# Altium PCB Adapt.PcbDoc
Units mm, origin at the board's own origin, x right, y up, seen from the top; angles counter-clockwise.
Board outline 50 x 72 mm, 2 copper layers (Top Layer, Bottom Layer); 78 components, 54 nets, 333 pads, 335 vias.
Unrouted connection lines stored in the file: 2.
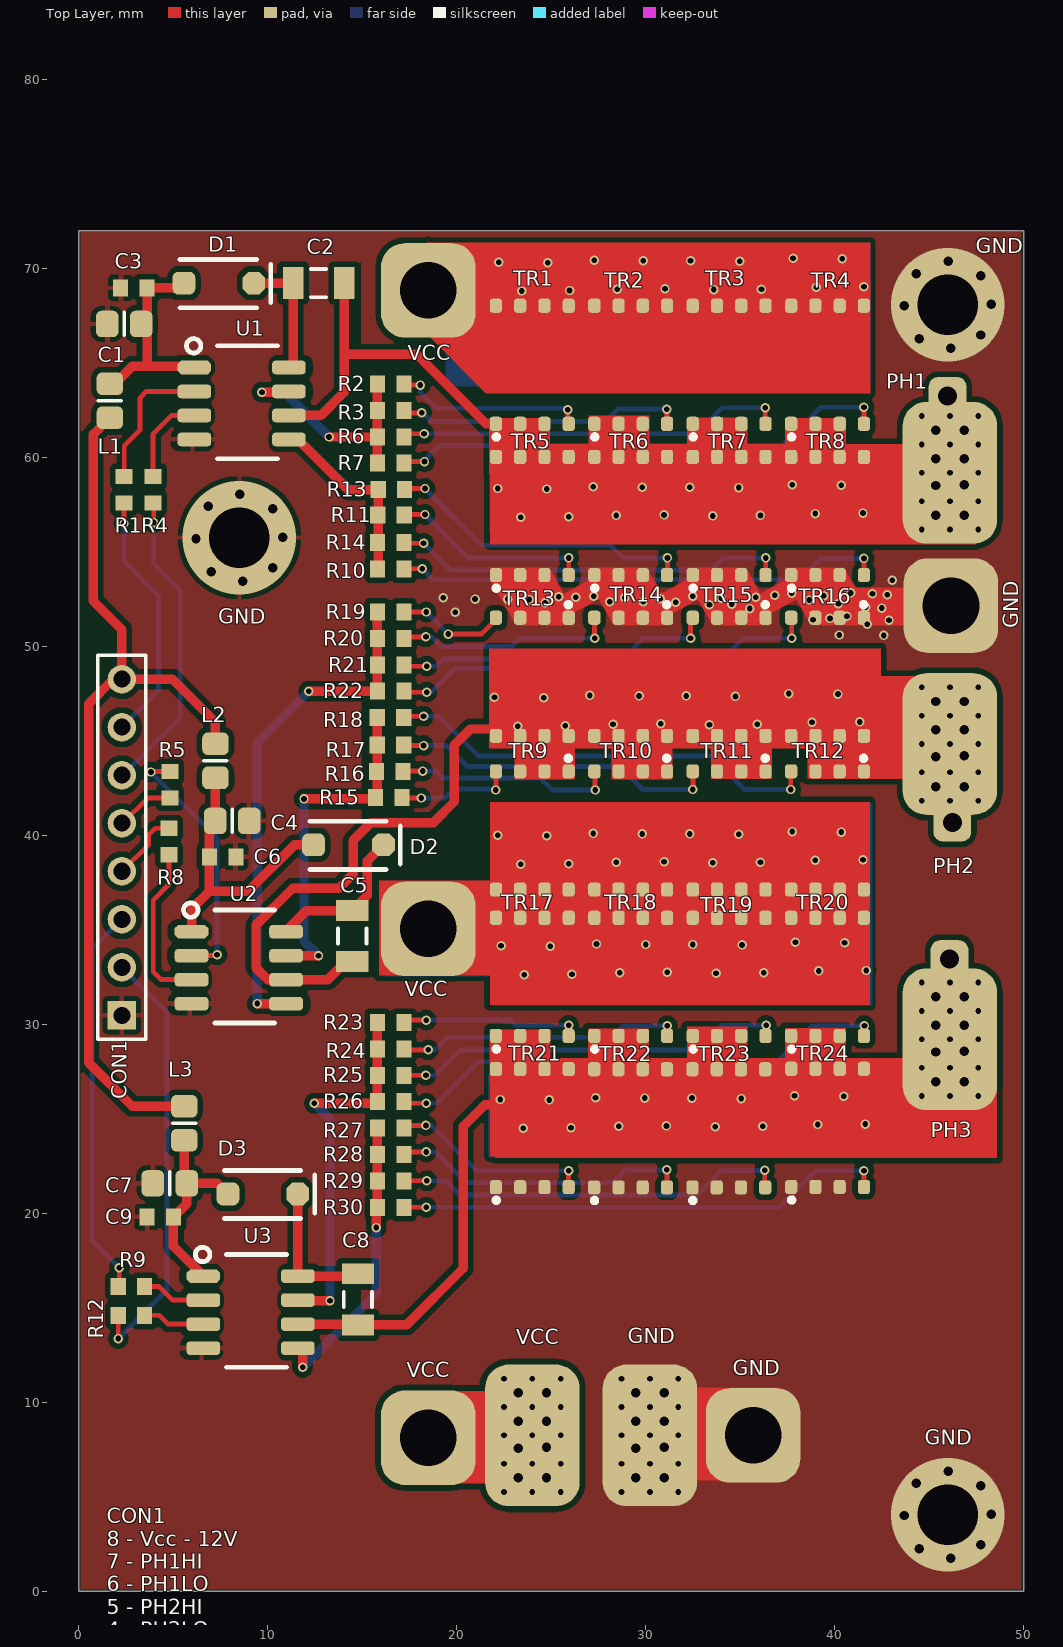
[diagram p0: Top Layer view]
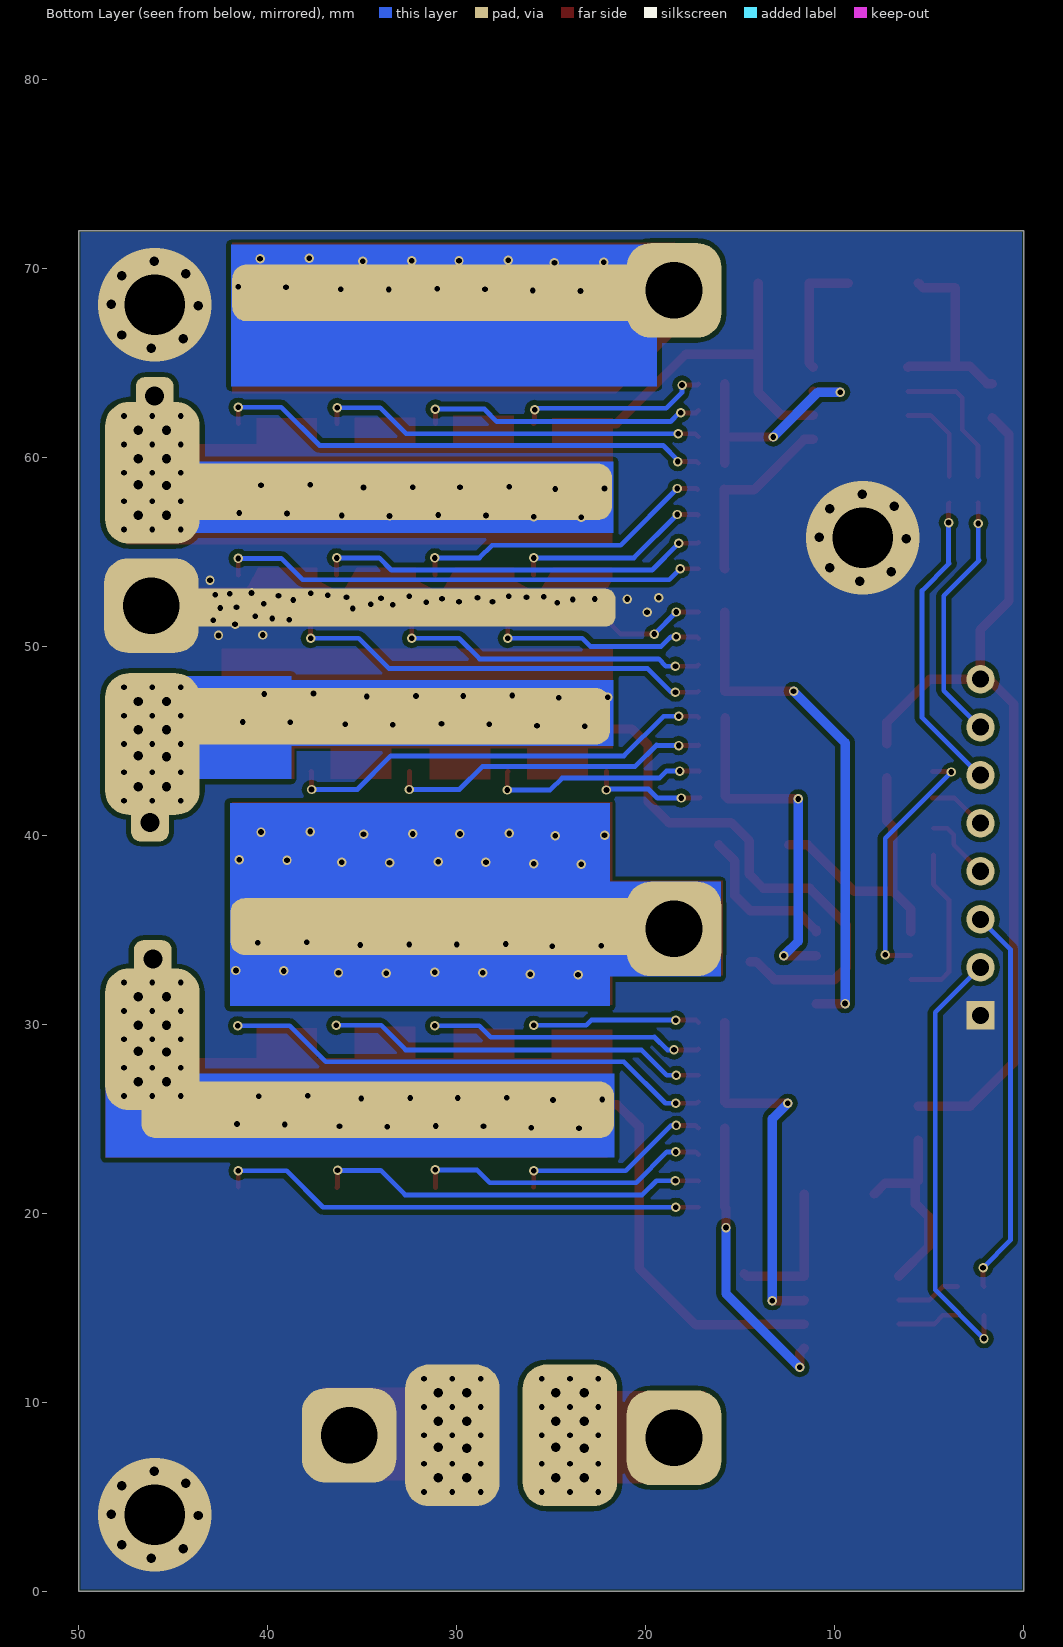
[diagram p1: Bottom Layer view, seen from below]

## Layer stack, top to bottom
Top Solder: solder mask 0.0102, Solder Resist, Dk 3.5
Top Layer: signal copper 0.0356
Dielectric 1: dielectric 0.32, FR-4, Dk 4.8
Bottom Layer: signal copper 0.0356
Bottom Solder: solder mask 0.0102, Solder Resist, Dk 3.5

## Board outline
0,0 50,0 50,72 0,72

## Design rules (kind name [scope] priority, off if disabled: settings)
Clearance Clearance_4 [InNamedPolygon('top-gnd-1')] p1: gap=0.3 ignorepadtopadclearanceinfootprint=FALSE
Clearance Clearance_3 [InNamedPolygon('top-gnd-2')] p2: gap=0.3 ignorepadtopadclearanceinfootprint=FALSE
Clearance Clearance_2 [InNamedPolygon('top-gnd-1')] p3: gap=0.3 ignorepadtopadclearanceinfootprint=FALSE
Clearance Clearance_1 [InNamedPolygon('top-gnd-1')] p4: gap=0.3 ignorepadtopadclearanceinfootprint=FALSE
Clearance [All] p5: gap=0.254 ignorepadtopadclearanceinfootprint=TRUE except(0: Arc-Hole Track-Hole SMDPad-Hole THPad-Hole Via-Hole Fill-Hole Poly-Hole Region-Hole Text-Hole)
PasteMaskExpansion [All] p1: expansion=0
PolygonConnect PolygonConnect_2 [All vs IsNamedPolygon('bottom-gnd-1')] p1: connectstyle=Direct reliefconductorwidth=0.254 reliefentries=4 polygonreliefangle="90 Angle" airgapwidth=0.254
PolygonConnect PolygonConnect_1 [All vs IsNamedPolygon('top-gnd-2')] p2: connectstyle=Direct reliefconductorwidth=0.254 reliefentries=4 polygonreliefangle="90 Angle" airgapwidth=0.254
PolygonConnect [All] p3: connectstyle=Relief reliefconductorwidth=0.254 reliefentries=4 polygonreliefangle="90 Angle" airgapwidth=0.254
RoutingVias [All] p1: holewidth=0.711 width=1.27 viastyle="Through Hole" minholewidth=0.711 minwidth=1.27 maxholewidth=0.711 maxwidth=1.27
SolderMaskExpansion [All] p1: expansion=0.102
Width [All] p1: maxlimit=0.5 minlimit=0.254 preferedwidth=0.254
29 further rules are at their usual default settings.

## Components (designator, comment, footprint, x,y, rotation, side; value= is the part's Value field where it differs from the comment)
C1 "4.7uF" 0805_N 2.413,67.056 r0 top
C2 "4.7uF" C1206 12.7,69.215 r180 top
C3 "100nF" 1608[0603] 2.921,68.961 r0 top
C4 "4.7uF" 0805_N 8.128,40.767 r180 top
C5 "4.7uF" C1206 14.478,34.671 r90 top
C6 "100nF" 1608[0603] 7.62,38.862 r180 top
C7 "4.7uF" 0805_N 4.826,21.59 r0 top
C8 "4.7uF" C1206 14.775,15.45 r90 top
C9 "100nF" 1608[0603] 4.318,19.812 r0 top
CON1 "Header 8" HDR1X8 2.286,30.48 r90 top
D1 "Diode PMEG6020ER" SOD123 9.271,69.215 r180 top
D2 "Diode PMEG6020ER" SOD123 16.129,39.497 r180 top
D3 "Diode PMEG6020ER" SOD123 11.6,21.025 r180 top
GND "PPAD" "mec-hole3.2mm /5.0 MM" 30.226,8.255 r90 top (schematic designator PHGND1)
L1 "FB 1K" 0805_N 1.651,62.992 r270 top
L2 "FB 1K" 0805_N 7.239,43.942 r90 top
L3 "FB 1K" 0805_N 5.588,24.765 r90 top
PH1 "PPAD" "mec-hole3.2mm /5.0 MM" 46.101,59.182 r90 top
PH2 "PPAD" "mec-hole3.2mm /5.0 MM" 46.101,44.831 r90 top
PH3 "PPAD" "mec-hole3.2mm /5.0 MM" 46.101,29.21 r90 top
R1 "300R" 1608[0603] 2.413,58.293 r90 top
R2 "100" 1608[0603] 16.51,63.881 r0 top
R3 "100" 1608[0603] 16.51,62.484 r0 top
R4 "300R" 1608[0603] 3.937,58.293 r90 top
R5 "300R" 1608[0603] 4.826,42.672 r90 top
R6 "100" 1608[0603] 16.51,61.087 r0 top
R7 "100" 1608[0603] 16.51,59.69 r0 top
R8 "300R" 1608[0603] 4.775,39.675 r270 top
R9 "300R" 1608[0603] 2.794,16.129 r0 top
R10 "100" 1608[0603] 16.51,54.102 r0 top
R11 "100" 1608[0603] 16.525,56.95 r0 top
R12 "300R" 1608[0603] 2.794,14.605 r0 top
R13 "100" 1608[0603] 16.55,58.3 r0 top
R14 "100" 1608[0603] 16.51,55.499 r0 top
R15 "100" 1608[0603] 16.41,42.003 r0 top
R16 "100" 1608[0603] 16.46,43.381 r0 top
R17 "100" 1608[0603] 16.5,44.775 r0 top
R18 "100" 1608[0603] 16.5,46.225 r0 top
R19 "100" 1608[0603] 16.51,51.816 r0 top
R20 "100" 1608[0603] 16.51,50.419 r0 top
R21 "100" 1608[0603] 16.51,49.022 r0 top
R22 "100" 1608[0603] 16.51,47.625 r0 top
R23 "100" 1608[0603] 16.51,30.099 r0 top
R24 "100" 1608[0603] 16.51,28.702 r0 top
R25 "100" 1608[0603] 16.51,27.305 r0 top
R26 "100" 1608[0603] 16.51,25.908 r0 top
R27 "100" 1608[0603] 16.51,24.511 r0 top
R28 "100" 1608[0603] 16.51,23.114 r0 top
R29 "100" 1608[0603] 16.51,21.717 r0 top
R30 "100" 1608[0603] 16.51,20.32 r0 top
TR1 "CSD16408Q5C" SON5X6 24.003,64.897 r180 top
TR2 "CSD16408Q5C" SON5X6 29.21,64.897 r180 top
TR3 "CSD16408Q5C" SON5X6 34.417,64.897 r180 top
TR4 "CSD16408Q5C" SON5X6 39.624,64.897 r180 top
TR5 "CSD16408Q5C" SON5X6 24.003,56.896 r180 top
TR6 "CSD16408Q5C" SON5X6 29.21,56.896 r180 top
TR7 "CSD16408Q5C" SON5X6 34.417,56.896 r180 top
TR8 "CSD16408Q5C" SON5X6 39.624,56.896 r180 top
TR9 "CSD16408Q5C" SON5X6 24.003,40.259 r0 top
TR10 "CSD16408Q5C" SON5X6 29.21,40.259 r0 top
TR11 "CSD16408Q5C" SON5X6 34.417,40.259 r0 top
TR12 "CSD16408Q5C" SON5X6 39.624,40.259 r0 top
TR13 "CSD16408Q5C" SON5X6 24.003,48.387 r0 top
TR14 "CSD16408Q5C" SON5X6 29.21,48.387 r0 top
TR15 "CSD16408Q5C" SON5X6 34.417,48.387 r0 top
TR16 "CSD16408Q5C" SON5X6 39.624,48.387 r0 top
TR17 "CSD16408Q5C" SON5X6 24.003,32.512 r180 top
TR18 "CSD16408Q5C" SON5X6 29.21,32.512 r180 top
TR19 "CSD16408Q5C" SON5X6 34.417,32.512 r180 top
TR20 "CSD16408Q5C" SON5X6 39.624,32.512 r180 top
TR21 "CSD16408Q5C" SON5X6 24.003,24.511 r180 top
TR22 "CSD16408Q5C" SON5X6 29.2,24.5 r180 top
TR23 "CSD16408Q5C" SON5X6 34.4,24.5 r180 top
TR24 "CSD16408Q5C" SON5X6 39.625,24.525 r180 top
U1 "IRS2001" "SO8 (reflow)" 8.625,62.85 r270 top
U2 "IRS2001" "SO8 (reflow)" 8.475,33 r270 top
U3 "IRS2001" "SO8 (reflow)" 9.1,14.775 r270 top
VCC "PPAD" "mec-hole3.2mm /5.0 MM" 24.003,8.255 r90 top (schematic designator PHVCC)

## Footprints (in the part's own frame and the unit in brackets; to place one, negate y for a bottom-side part, rotate by r counter-clockwise, add the part's x,y. Pads: shape width x height; smd on the part's side, far side on the other; paste and mask are expansions set on the pad)
0805_N [mm] "Chip Resistor, Body 2.0x1.2mm, IPC Medium Density"
  rrect50% 1.2x1.4 smd: 1(-0.9,0) 2(0.9,0)
  silkscreen extent 0,-0.6 0,0.6
1608[0603] [mm] "Chip Capacitor, Body 1.6x0.8mm, IPC High Density"
  rect 0.8x0.9 smd: 1(-0.7,0) 2(0.7,0)
  body extent -0.87,-0.48 0.87,0.48, height 1.3
C1206 [mm] "Chip Capacitor, Body 3.2x1.6mm, IPC High Density"
  rect 1.1x1.7 smd: 1(-1.35,0) 2(1.35,0)
  silkscreen extent -0.4,-0.75 0.4,0.75, body extent -1.7,-0.9 1.7,0.9, height 1.3
HDR1X8 [mm] "Connector; Header; 8 Position"
  rect 1.5x1.5 hole 0.9: 1(0,0)
  round 1.5 hole 0.9: 2(2.54,0) 3(5.08,0) 4(7.62,0) 5(10.16,0) 6(12.7,0) 7(15.24,0) 8(17.78,0)
  silkscreen extent -1.27,-1.27 19.05,1.27
"mec-hole3.2mm /5.0 MM" [mm]
  rrect50% 7.5x5 hole 0.3: 1(0,0)
"SO8 (reflow)" [mm]
  oct 0.72x1.78 smd: 1(-1.905,-2.5)
  rrect50% 0.72x1.78 smd: 2(-0.635,-2.5) 3(0.635,-2.5) 4(1.905,-2.5) 5(1.905,2.5) 6(0.635,2.5) 7(-0.635,2.5) 8(-1.905,2.5)
  silkscreen extent -3.43,-2.92 2.92,1.91
SOD123 [mm]
  oct 1.2x1.2 smd paste-0.1 mask+0.1: 1(0,0)
  rrect50% 1.2x1.2 smd paste-0.1 mask+0.1: 2(3.7,0)
  silkscreen extent -0.89,-1.25 3.9,1.3
SON5X6 [mm]
  rrect50% 0.65x0.75 smd: 1(1.925,3.125) 2(0.642,3.125) 3(-0.642,3.125) 4(-1.925,3.125) 5(-1.925,-3.125) 6(-0.642,-3.125) 7(0.642,-3.125) 8(1.925,-3.125)
  Top Layer region: -2.25,-2.926 2.25,-2.926 2.25,1.497 -2.25,1.497
  silkscreen extent 1.78,3.69 2.03,3.94

## Part data
C1 C4 C7: library part C10u-10%-0805, "4.7uF Surface mount CAP 0805 10% 50V", Tolerance=10%, Voltage=50V, (OldCtfName)=(CTF_OLD_NAME_INVALID)
C2 C5 C8: library part C10uF/63V-1210, "4.7uF Surface mount CAP 0805 10% 50V", Tolerance=20%, Voltage=50V, (OldCtfName)=(CTF_OLD_NAME_INVALID)
C3 C6 C9: library part C100n-10%-0603, "100nF Surface mount CAP 0603 10% 50V", Tolerance=10%, Voltage=50V, (OldCtfName)=(CTF_OLD_NAME_INVALID)
CON1: "Header, 8-Pin", LatestRevisionDate=17-Jul-2002, LatestRevisionNote="Re-released for DXP Platform.", Publisher="Altium Limited"
D1 D2 D3: library part "Diode BPMEG6020ER", "Silicon RF Schottky Diode for Mixer Applications in the VHF/UHF Range", ComponentLink1Description="Manufacturer Link", ComponentLink1URL=http://www.infineon.com/, ComponentLink2Description=Datasheet, ComponentLink2URL=http://www.infineon.com/upload/Document/cmc_upload/documents/009/363/bat17series.pdf, DatasheetVersion=Oct-1999, LatestRevisionDate=29-May-2009, LatestRevisionNote="IPC-7351 Footprint Added.", Note="Pin 2 is not connected and not drawn.", PackageDescription="3-Pin SOT-23 Package 0.95 mm Pitch, 2.5 mm Lead Span", PackageReference=SOT-23, PackageVersion=Sep-2001, Published=21-Mar-2003, Publisher="Altium Limited"
GND PH1 PH2 PH3 VCC: library part "I-GAT 3.2/5 mm", "Power Pad", (OldCtfName)=(CTF_OLD_NAME_INVALID)
L1 L2 L3: library part XAL4030-332-MEB, "Ferrite Bead 1K 0805", Tolerance=20%, (OldCtfName)=(CTF_OLD_NAME_INVALID), Elec_type="ferrite bead"
R1 R4 R5 R8 R9 R12: library part R300-1%-0603, "300R SMD 0603 1%", Tolerance=1%, (OldCtfName)=(CTF_OLD_NAME_INVALID), Wattage=0.065W
R2 R3 R6 R7 R10 R11 R13 R14 R15 R16 R17 R18 R19 R20 R21 R22 R23 R24 R25 R26 R27 R28 R29 R30: library part RS, "100R SMD 0603 1%", Tolerance=1%, (OldCtfName)=(CTF_OLD_NAME_INVALID), Wattage=0.065W
TR1 TR2 TR3 TR4 TR5 TR6 TR7 TR8 TR9 TR10 TR11 TR12 TR13 TR14 TR15 TR16 TR17 TR18 TR19 TR20 TR21 TR22 TR23 TR24: "N-CHANNEL MOSFET DirectFet", Manufacturer=TI, (OldCtfName)=(CTF_OLD_NAME_INVALID)
U1 U2 U3: "DOUBLE MOSFET DRIVED", Manufacturer=TI, (OldCtfName)=(CTF_OLD_NAME_INVALID)

## Free pads (board coordinates)
  rrect50% 5x5 hole 3: 9(18.5,8.128) 9(18.5,35.052) 9(18.5,68.834) 10(35.687,8.255) 13(46.15,52.15)
  rrect50% 25x3 smd far side: 14(29.375,68.7) 15(34.275,58.175) 16(34.375,46.3) 17(29.475,35.175) 18(34.175,25.475)
  rrect50% 25x2 smd far side: 16(34.1,52.05)
  rrect50% 2x2 hole 1: 19(45.975,63.25) 20(46.225,40.675) 21(46.075,33.45)

## Via types
v1: diameter 0.5, hole 0.3, Top Layer to Bottom Layer, tented both sides, 198 vias
v2: diameter 0.3, hole 0.3, Top Layer to Bottom Layer, 70 vias
v3: diameter 0.5, hole 0.5, Top Layer to Bottom Layer, 40 vias
v4: diameter 0.8, hole 0.5, Top Layer to Bottom Layer, 24 vias
v5: diameter 6/6 (per signal layer), hole 3.2, Top Layer to Bottom Layer, 3 vias

## Nets (pads, with @x,y where several pads share a name; then routed paths per layer and width w, separated by ;. In a path a pad name is that pad's centre, name@x,y a point inside that pad or via, vN(x,y) a via of type N, cw(c..) or ccw(c..) an arc to the next point about the centre after c; other vN are vias at no path point)
GND: C1.1 C3.1 C4.1 C6.1 C7.1 C9.1 CON1.1 GND.1 pad.10 pad.13 pad.16@34.1,52.05 TR5.1 TR5.2 TR5.3 TR6.1 TR6.2 TR6.3 TR7.1 TR7.2 TR7.3 TR8.1 TR8.2 TR8.3 TR13.1 TR13.2 TR13.3 TR14.1 TR14.2 TR14.3 TR15.1 TR15.2 TR15.3 TR16.1 TR16.2 TR16.3 TR21.1 TR21.2 TR21.3 TR22.1 TR22.2 TR22.3 TR23.1 TR23.2 TR23.3 TR24.1 TR24.2 TR24.3 U1.4 U2.4 U3.4
  other v1: 42.6,50.575 40.25,50.6 41.725,51.175 42.875,51.375 38.85,51.4 39.75,51.475 40.65,51.6 19.925,51.8 35.5,52 42.5,52.025 41.65,52.075 33.375,52.2 34.55,52.225 40.2,52.25 24.675,52.3 31.6,52.325 28.1,52.35 29.875,52.35 38.65,52.45 23.85,52.475 20.975,52.5 22.7,52.5 30.775,52.525 34,52.55 19.3,52.575 28.9,52.575 26.3,52.6 35.825,52.6 25.395,52.631 27.25,52.65 32.5,52.65 39.425,52.675 36.825,52.7 42.775,52.725 42,52.775 37.725,52.8 40.85,52.825 43.05,53.5
  other v2: 28.726,5.255 30.226,5.255 31.726,5.255 28.726,6.755 30.226,6.755 31.726,6.755 28.726,8.255 31.726,8.255 28.726,9.755 30.226,9.755 31.726,9.755 28.726,11.255 30.226,11.255 31.726,11.255
  other v3: 29.476,6.005 30.976,6.005 29.476,7.583 30.976,7.632 29.476,9.005 30.976,9.005 29.476,10.505 30.976,10.505
  other v4: 46.149,1.764 44.474,2.264 47.724,2.464 43.674,4.014 48.274,4.089 47.724,5.589 44.324,5.714 45.999,6.364 8.684,53.453 7.009,53.953 10.259,54.153 6.209,55.703 10.809,55.778 10.259,57.278 6.859,57.403 8.534,58.053 46.149,65.772 44.474,66.272 47.724,66.472 43.674,68.022 48.274,68.097 47.724,69.597 44.324,69.722 45.999,70.372
  other v5: 45.974,4.064 8.509,55.753 45.974,68.072
NetR1_2: R1.2 U1.2 | length 7.5
  Top Layer w0.254: R1.2 2.413,60.613 3.25,61.45 3.25,63.15 3.585,63.485 U1.2
NetR2_2: R2.2 TR1.4 | length 10.3
  Top Layer w0.254: R2.2 17.266,63.825 v1(18.075,63.825) ; v1(25.875,62.525) 25.875,61.825 TR1.4
  Bottom Layer w0.254: v1(18.075,63.825) 18.075,63.436 18.911,62.6 25.875,62.6 v1(25.875,62.525)
NetR3_2: R3.2 TR2.4 | length 15.2
  Top Layer w0.254: R3.2 17.344,62.35 v1(18.15,62.35) ; v1(31.125,62.55) 31.125,61.782 TR2.4
  Bottom Layer w0.254: v1(18.15,62.35) 18.229,62.35 18.685,61.894 27.869,61.894 28.525,62.55 v1(31.125,62.55)
NetR4_2: R4.2 U1.3 | length 4.8
  Top Layer w0.254: R4.2 3.937,61.237 4.915,62.215 U1.3
NetR5_2: R5.2 U2.2 | length 13.5
  Top Layer w0.254: v1(3.825,43.35) 3.847,43.372 R5.2 ; U2.2 7.285,33.635 v1(7.325,33.675)
  Bottom Layer w0.254: v1(3.825,43.35) 7.325,39.85 v1(7.325,33.675)
NetR6_2: R6.2 TR3.4 | length 20.6
  Top Layer w0.254: R6.2 17.373,61.25 v1(18.275,61.25) ; v1(36.325,62.625) 36.325,61.789 TR3.4
  Bottom Layer w0.254: v1(18.275,61.25) 32.675,61.25 34.05,62.625 v1(36.325,62.625)
NetR7_2: R7.2 TR4.4 | length 26.5
  Top Layer w0.254: R7.2 17.295,59.775 v1(18.3,59.775) ; TR4.4 TR4.4 v1(41.55,62.65)
  Bottom Layer w0.254: v1(18.3,59.775) 18.3,59.85 19.075,60.625 37.25,60.625 39.275,62.65 v1(41.55,62.65)
NetR8_2: R8.2 U2.3 | length 8.7
  Top Layer w0.254: R8.2 4.775,37.4 3.95,36.575 3.95,32.775 4.36,32.365 U2.3
NetR9_2: R9.2 U3.2 | length 3.4
  Top Layer w0.254: R9.2 4.271,16.129 4.99,15.41 U3.2
NetR10_2: R10.2 TR8.4 | length 25.9
  Top Layer w0.254: R10.2 17.212,54.1 v1(18.175,54.1) ; TR8.4 TR8.4 v1(41.55,54.65)
  Bottom Layer w0.254: v1(18.175,54.1) 18.75,53.525 38.15,53.525 39.275,54.65 v1(41.55,54.65)
NetR11_2: R11.2 TR5.4 | length 10.6
  Top Layer w0.254: R11.2 17.25,56.975 v1(18.325,56.975) ; v1(25.926,54.678) 25.926,53.775 25.925,53.774 TR5.4
  Bottom Layer w0.254: v1(18.325,56.975) 20.622,54.678 v1(25.926,54.678)
NetR12_2: R12.2 U3.3 | length 3.3
  Top Layer w0.254: R12.2 4.27,14.605 4.735,14.14 U3.3
NetR13_2: R13.2 TR6.4 | length 16.4
  Top Layer w0.254: R13.2 17.3,58.35 v1(18.325,58.35) ; TR6.4 31.152,53.788 v1(31.152,54.678)
  Bottom Layer w0.254: v1(18.325,58.35) 21.325,55.35 28.125,55.35 28.797,54.678 v1(31.152,54.678)
NetR14_2: R14.2 TR7.4 | length 20.9
  Top Layer w0.254: R14.2 17.259,55.45 v1(18.25,55.45) ; TR7.4 36.35,53.779 v1(36.35,54.675)
  Bottom Layer w0.254: v1(18.25,55.45) 19.661,54.039 33.464,54.039 34.1,54.675 v1(36.35,54.675)
NetR15_2: R15.2 TR9.4 | length 6.2
  Top Layer w0.254: R15.2 17.138,41.975 v1(18.125,41.975) ; v1(22.075,42.4) 22.078,42.403 TR9.4
  Bottom Layer w0.254: v1(18.125,41.975) 19.375,41.975 19.85,42.45 22.025,42.45 v1(22.075,42.4)
NetR16_2: R16.2 TR10.4 | length 11.6
  Top Layer w0.254: R16.2 17.179,43.4 v1(18.2,43.4) ; TR10.4 27.325,43.344 v1(27.325,42.4)
  Bottom Layer w0.254: v1(18.2,43.4) 18.9,43.4 19.269,43.031 24.419,43.031 25.05,42.4 v1(27.325,42.4)
NetR17_2: R17.2 TR11.4 | length 17.3
  Top Layer w0.254: R17.2 17.225,44.75 v1(18.25,44.75) ; TR11.4 32.5,43.376 v1(32.5,42.425)
  Bottom Layer w0.254: v1(18.25,44.75) 19.4,44.75 19.425,44.775 20.55,43.65 28.625,43.65 29.85,42.425 v1(32.5,42.425)
NetR18_2: R18.2 TR12.4 | length 23.1
  Top Layer w0.254: R18.2 17.275,46.3 v1(18.25,46.3) ; v1(37.675,42.425) 37.675,43.36 TR12.4
  Bottom Layer w0.254: v1(18.25,46.3) 19.05,46.3 21.15,44.2 33.475,44.2 35.25,42.425 v1(37.675,42.425)
NetR19_2: R19.2 TR13.4 | length 5.8
  Top Layer w0.254: R19.2 v1(18.384,51.816) ; v1(19.55,50.65) 21.31,50.65 22.125,51.465 TR13.4
  Bottom Layer w0.254: v1(18.384,51.816) v1(19.55,50.65)
NetR20_2: R20.2 TR14.4 | length 11.6
  Top Layer w0.254: R20.2 17.291,50.5 v1(18.375,50.5) ; TR14.4 27.301,51.496 27.3,51.494 v1(27.3,50.425)
  Bottom Layer w0.254: v1(18.375,50.5) 18.675,50.5 19.181,49.994 22.919,49.994 23.35,50.425 v1(27.3,50.425)
NetR21_2: R21.2 TR15.4 | length 17
  Top Layer w0.254: R21.2 17.282,48.95 v1(18.425,48.95) ; v1(32.375,50.425) 32.375,51.329 32.525,51.479 TR15.4
  Bottom Layer w0.254: v1(18.425,48.95) 18.925,48.95 19.308,49.333 28.783,49.333 29.875,50.425 v1(32.375,50.425)
NetR22_2: R22.2 TR16.4 | length 22.8
  Top Layer w0.254: R22.2 17.26,47.575 v1(18.425,47.575) ; TR16.4 37.725,51.486 v1(37.725,50.425)
  Bottom Layer w0.254: v1(18.425,47.575) 18.65,47.575 19.9,48.825 33.575,48.825 35.175,50.425 v1(37.725,50.425)
NetR23_2: R23.2 TR17.4 | length 8.9
  Top Layer w0.254: R23.2 17.336,30.225 v1(18.4,30.225)
  Bottom Layer w0.254: v1(18.4,30.225) 22.875,30.225 23.15,29.95 v1(25.925,29.95)
NetR24_2: R24.2 TR18.4 | length 14.5
  Top Layer w0.254: R24.2 17.262,28.65 v1(18.5,28.65)
  Bottom Layer w0.254: v1(18.5,28.65) 18.858,28.65 19.533,29.325 19.539,29.319 28.194,29.319 28.8,29.925 v1(31.15,29.925)
NetR25_2: R25.2 TR19.4 | length 20.3
  Top Layer w0.254: R25.2 v1(18.375,27.305)
  Bottom Layer w0.254: v1(18.375,27.305) 18.88,27.305 20.225,28.65 32.7,28.65 34,29.95 v1(36.375,29.95)
NetR26_2: R26.2 TR20.4 | length 26.1
  Top Layer w0.254: R26.2 17.293,25.825 v1(18.4,25.825)
  Bottom Layer w0.254: v1(18.4,25.825) 18.95,25.825 21.15,28.025 36.925,28.025 38.825,29.925 v1(41.575,29.925)
NetR27_2: R27.2 TR21.4 | length 10.6
  Top Layer w0.254: R27.2 17.349,24.65 v1(18.375,24.65) ; v1(25.925,22.25) 25.925,21.389 TR21.4
  Bottom Layer w0.254: v1(18.375,24.65) 18.65,24.65 21.05,22.25 v1(25.925,22.25)
NetR28_2: R28.2 TR22.4 | length 15.9
  Top Layer w0.254: R28.2 17.346,23.25 v1(18.4,23.25) ; TR22.4 v1(31.125,22.3)
  Bottom Layer w0.254: v1(18.4,23.25) 18.875,23.25 20.506,21.619 28.244,21.619 28.925,22.3 v1(31.125,22.3)
NetR29_2: R29.2 TR23.4 | length 20.9
  Top Layer w0.254: R29.2 17.218,21.725 v1(18.425,21.725) ; v1(36.3,22.275) 36.3,21.4 TR23.4
  Bottom Layer w0.254: v1(18.425,21.725) 19.425,21.725 20.175,20.975 32.725,20.975 34.025,22.275 v1(36.3,22.275)
NetR30_2: R30.2 TR24.4 | length 26
  Top Layer w0.254: R30.2 18.395,20.32 v1(18.4,20.325) ; TR24.4 v1(41.55,22.25)
  Bottom Layer w0.254: v1(18.4,20.325) 37.065,20.325 37.07,20.32 39,22.25 v1(41.55,22.25)
OPH1H: CON1.7 R1.1 | length 13.5
  Top Layer w0.254: v1(2.4,56.5) 2.4,57.58 R1.1
  Bottom Layer w0.254: CON1.7 4.225,47.659 4.225,52.675 2.35,54.55 2.4,54.6 v1(2.4,56.5)
OPH1L: CON1.6 R4.1 | length 16.3
  Top Layer w0.254: R4.1 3.975,57.555 v1(3.975,56.55)
  Bottom Layer w0.254: CON1.6 2.33,43.18 5.375,46.225 5.375,52.95 3.937,54.388 3.975,54.426 v1(3.975,56.55)
OPH2H: CON1.5 R5.1 | length 3.1
  Top Layer w0.254: CON1.5 2.315,40.64 3.647,41.972 R5.1
OPH2L: CON1.4 R8.1 | length 3.7
  Top Layer w0.254: CON1.4 3.7,39.514 3.7,40.025 4.05,40.375 R8.1
OPH3H: CON1.3 R9.1 | length 20.7
  Top Layer w0.254: R9.1 2.15,16.185 v1(2.15,17.125)
  Bottom Layer w0.254: v1(2.15,17.125) 0.7,18.575 0.7,33.974 CON1.3
OPH3L: CON1.2 R12.1 | length 22.9
  Top Layer w0.254: R12.1 2.094,13.381 v1(2.1,13.375)
  Bottom Layer w0.254: v1(2.1,13.375) 4.675,15.95 4.675,30.631 CON1.2
P1HI: R2.1 R3.1 R6.1 R7.1 U1.7 | length 12.7
  Top Layer w0.5: v1(9.7,63.45) 11.09,63.45 U1.7 ; v1(13.25,61.075) 15.798,61.075 R6.1 ; R7.1 R6.1 ; R2.1 R3.1 R6.1
  Bottom Layer w0.5: v1(9.7,63.45) 10.875,63.45 v1(13.25,61.075)
P1LO: R10.1 R11.1 R13.1 R14.1 U1.5 | length 10.1
  Top Layer w0.5: U1.5 11.605,60.945 14.275,58.275 15.825,58.275 R13.1 15.85,54.142 R10.1
P2HI: R15.1 R16.1 R17.1 R18.1 U2.7 | length 18.4
  Top Layer w0.5: U2.7 v1(12.69,33.635) ; v1(11.925,41.925) 15.632,41.925 R15.1 15.8,42.093 R17.1 R18.1
  Bottom Layer w0.5: v1(11.925,41.925) 11.925,34.4 v1(12.69,33.635)
P2LO: R19.1 R20.1 R21.1 R22.1 U2.5 | length 27
  Top Layer w0.5: v1(9.45,31.1) 10.97,31.1 U2.5 ; v1(12.175,47.625) R22.1 R21.1 R20.1 R19.1
  Bottom Layer w0.5: v1(9.45,31.1) 9.45,44.9 v1(12.175,47.625)
P3HI: R23.1 R24.1 R25.1 R26.1 U3.7 | length 20.1
  Top Layer w0.5: U3.7 11.635,15.375 v1(13.3,15.375) ; v1(12.475,25.825) 15.727,25.825 R26.1 R25.1 R24.1 R23.1
  Bottom Layer w0.5: v1(12.475,25.825) 13.3,25 v1(13.3,15.375)
P3LO: R27.1 R28.1 R29.1 R30.1 U3.5 | length 15.4
  Top Layer w0.5: U3.5 11.85,12.62 v1(11.85,11.85) ; v1(15.75,19.25) 15.75,20.26 R30.1 R29.1 R28.1 R27.1
  Bottom Layer w0.5: v1(11.85,11.85) 15.75,15.75 v1(15.75,19.25)
P12V: CON1.8 L1.2 L2.2 L3.2 | length 49.2
  Top Layer w0.5: L1.2 0.775,61.216 0.775,52.4 2.286,50.889 CON1.8 ; L3.2 2.835,25.665 0.525,27.975 0.525,46.95 1.835,48.26 CON1.8 ; L2.2 7.239,45.986 4.965,48.26 CON1.8
P15V: pad.9 pad.14 pad.17 TR1.5 TR1.6 TR1.7 TR1.8 TR2.5 TR2.6 TR2.7 TR2.8 TR3.5 TR3.6 TR3.7 TR3.8 TR4.5 TR4.6 TR4.7 TR4.8 TR9.5 TR9.6 TR9.7 TR9.8 TR10.5 TR10.6 TR10.7 TR10.8 TR11.5 TR11.6 TR11.7 TR11.8 TR12.5 TR12.6 TR12.7 TR12.8 TR17.5 TR17.6 TR17.7 TR17.8 TR18.5 TR18.6 TR18.7 TR18.8 TR19.5 TR19.6 TR19.7 TR19.8 TR20.5 TR20.6 TR20.7 TR20.8 VCC.1
  other v1: 23.575,32.625 26.1,32.65 33.725,32.7 28.625,32.725 36.25,32.725 31.15,32.75 39.15,32.825 41.675,32.85 22.35,34.15 24.95,34.125 35.1,34.2 30,34.225 32.5,34.225 27.4,34.25 40.525,34.325 37.925,34.35 23.4,38.475 25.925,38.5 33.55,38.55 28.45,38.575 36.075,38.575 30.975,38.6 38.975,38.675 41.5,38.7 24.775,39.975 22.175,40 34.925,40.05 29.825,40.075 32.325,40.075 27.225,40.1 40.35,40.175 37.75,40.2 23.45,68.8 25.975,68.825 33.6,68.875 28.5,68.9 36.125,68.9 31.025,68.925 39.025,69 41.55,69.025 24.825,70.3 22.225,70.325 34.975,70.375 29.875,70.4 32.375,70.4 27.275,70.425 40.4,70.5 37.8,70.525
  other v2: 22.503,5.255 24.003,5.255 25.503,5.255 22.503,6.755 24.003,6.755 25.503,6.755 22.503,8.255 25.503,8.255 22.503,9.755 24.003,9.755 25.503,9.755 22.503,11.255 24.003,11.255 25.503,11.255
  other v3: 23.253,6.005 24.753,6.005 23.253,7.583 24.753,7.632 23.253,9.005 24.753,9.005 23.253,10.505 24.753,10.505
PH1: C2.1 pad.15 pad.19 PH1.1 TR1.1 TR1.2 TR1.3 TR2.1 TR2.2 TR2.3 TR3.1 TR3.2 TR3.3 TR4.1 TR4.2 TR4.3 TR5.5 TR5.6 TR5.7 TR5.8 TR6.5 TR6.6 TR6.7 TR6.8 TR7.5 TR7.6 TR7.7 TR7.8 TR8.5 TR8.6 TR8.7 TR8.8 U1.6 | length 18.8
  Top Layer w0.5: U1.6 12.815,62.215 14.05,63.45 14.05,65.5 ; C2.1 14.05,65.5 ; TR1.1 21.553,61.772 17.875,65.45 14.1,65.45 14.05,65.5
  other v1: 23.4,56.825 25.925,56.85 33.55,56.9 28.45,56.925 36.075,56.925 30.975,56.95 38.975,57.025 41.5,57.05 24.775,58.325 22.175,58.35 34.925,58.4 29.825,58.425 32.325,58.425 27.225,58.45 40.35,58.525 37.75,58.55
  other v2: 44.601,56.182 46.101,56.182 47.601,56.182 44.601,57.682 46.101,57.682 47.601,57.682 44.601,59.182 47.601,59.182 44.601,60.682 46.101,60.682 47.601,60.682 44.601,62.182 46.101,62.182 47.601,62.182
  other v3: 45.351,56.932 46.851,56.932 45.351,58.51 46.851,58.559 45.351,59.932 46.851,59.932 45.351,61.432 46.851,61.432
PH2: C5.1 pad.16@34.375,46.3 pad.20 PH2.1 TR9.1 TR9.2 TR9.3 TR10.1 TR10.2 TR10.3 TR11.1 TR11.2 TR11.3 TR12.1 TR12.2 TR12.3 TR13.5 TR13.6 TR13.7 TR13.8 TR14.5 TR14.6 TR14.7 TR14.8 TR15.5 TR15.6 TR15.7 TR15.8 TR16.5 TR16.6 TR16.7 TR16.8 U2.6 | length 28.1
  Top Layer w0.5: C5.1 14.146,33.321 13.19,32.365 U2.6 10.01,32.365 9.385,32.99 9.385,35.26 11.325,37.2 13.775,37.2 14.521,37.946 14.521,39.721 15.475,40.675 18.775,40.675 19.875,41.775 19.875,44.775 20.725,45.625 22.375,45.625
  other v1: 23.225,45.775 25.75,45.8 33.375,45.85 28.275,45.875 35.9,45.875 30.8,45.9 38.8,45.975 41.325,46 24.6,47.275 22,47.3 34.75,47.35 29.65,47.375 32.15,47.375 27.05,47.4 40.175,47.475 37.575,47.5
  other v2: 44.601,41.831 46.101,41.831 47.601,41.831 44.601,43.331 46.101,43.331 47.601,43.331 44.601,44.831 47.601,44.831 44.601,46.331 46.101,46.331 47.601,46.331 44.601,47.831 46.101,47.831 47.601,47.831
  other v3: 45.351,42.581 46.851,42.581 45.351,44.159 46.851,44.208 45.351,45.581 46.851,45.581 45.351,47.081 46.851,47.081
PH3: C8.1 pad.18 pad.21 PH3.1 TR17.1 TR17.2 TR17.3 TR18.1 TR18.2 TR18.3 TR19.1 TR19.2 TR19.3 TR20.1 TR20.2 TR20.3 TR21.5 TR21.6 TR21.7 TR21.8 TR22.5 TR22.6 TR22.7 TR22.8 TR23.5 TR23.6 TR23.7 TR23.8 TR24.5 TR24.6 TR24.7 TR24.8 U3.6 | length 21.5
  Top Layer w0.5: U3.6 14.735,14.14 C8.1 17.35,14.1 20.35,17.1 20.35,24.6 21.5,25.75 23.85,25.75
  other v1: 23.525,24.5 26.05,24.525 33.675,24.575 28.575,24.6 31.1,24.625 36.2,24.6 39.1,24.7 41.625,24.725 24.9,26 22.3,26.025 35.05,26.075 29.95,26.1 32.45,26.1 27.35,26.125 40.475,26.2 37.875,26.225
  other v2: 44.601,26.21 46.101,26.21 47.601,26.21 44.601,27.71 46.101,27.71 47.601,27.71 44.601,29.21 47.601,29.21 44.601,30.71 46.101,30.71 47.601,30.71 44.601,32.21 46.101,32.21 47.601,32.21
  other v3: 45.351,26.96 46.851,26.96 45.351,28.538 46.851,28.587 45.351,29.96 46.851,29.96 45.351,31.46 46.851,31.46
U1BOOT: C2.2 D1.1 U1.8 | length 6.6
  Top Layer w0.5: D1.1 C2.2 11.35,64.98 U1.8
U1Vcc: C1.2 C3.2 D1.2 L1.1 U1.1 | length 11.1
  Top Layer w0.5: L1.1 1.917,63.892 2.85,64.825 3.675,64.825 ; D1.2 5.317,68.961 C3.2 3.621,64.879 3.675,64.825 ; U1.1 6.055,64.825 3.675,64.825
U2BOOT: C5.2 D2.1 U2.8 | length 8
  Top Layer w0.5: U2.8 U2.8@10.975,35 ; U2.8@11.104,35.071 12.054,36.021 C5.2 15.275,36.818 15.275,38.643 D2.1
U2Vcc: C4.2 C6.2 D2.2 L2.1 U2.1 | length 15.2
  Top Layer w0.5: U2.1 5.975,36.1 6.92,37.045 ; L2.1 7.239,40.778 C4.2 6.92,40.459 C6.2 6.92,37.045 ; D2.2 11.422,39.497 8.97,37.045 6.92,37.045
U3BOOT: C8.2 D3.1 U3.8 | length 7.6
  Top Layer w0.5: D3.1 U3.8 14.655,16.68 C8.2
U3Vcc: C7.2 C9.2 D3.2 L3.1 U3.1 | length 10.6
  Top Layer w0.5: L3.1 5.588,21.728 C7.2 ; U3.1 5.018,18.262 C9.2 5.726,20.52 C7.2 ; D3.2 7.335,21.59 C7.2

## Polygon pours and split planes (outlines as drawn)
GND on Top Layer "top-gnd-2" (solid, remove dead copper, pour order 2): 14.95,71.9 14.95,0.125 49.875,0.125 49.875,71.9
GND on Top Layer "top-gnd-1" (solid, remove dead copper, pour order 0): 0.125,71.9 0.125,0.125 14.95,0.125 14.95,71.9
GND on Bottom Layer "bottom-gnd-1" (solid, remove dead copper, pour order 4): 0.1,71.9 0.1,0.1 49.9,0.1 49.9,71.9

## Other copper
Top Layer:
  rectangle net GND: 28.45,5.875 37.125,10.775
  rectangle net P15V: 16.825,5.7 25.5,10.6
  rectangle net GND: 41.025,51.1 45.4,53.125
  rectangle net P15V: 21.753,31.015 41.874,41.756
  rectangle net PH1: 21.753,55.399 47.475,60.699
  rectangle net PH3: 22.025,22.925 48.6,28.225
  rectangle net PH3: 37.375,26.85 40.6,29.8
  rectangle net PH3: 32.175,26.925 35.4,29.875
  rectangle net PH3: 26.95,26.825 30.175,29.775
  rectangle net PH3: 21.75,26.775 24.975,29.725
  rectangle net PH1: 37.375,59.125 40.6,62.075
  rectangle net PH1: 32.175,59.15 35.4,62.1
  rectangle net PH1: 26.975,59.25 30.2,62.2
  rectangle net PH1: 21.725,59.125 24.95,62.075
  rectangle net P15V: 15.9,32.575 41.875,37.6
  rectangle net PH2: 21.725,44.6 42.45,49.884
  rectangle net PH2: 41.2,42.975 47.7,48.425
  rectangle net PH2: 38.575,42.975 41.8,45.925
  rectangle net PH2: 33.45,42.975 36.675,45.925
  rectangle net PH2: 28.2,42.95 31.425,45.9
  rectangle net PH2: 23.05,42.95 26.275,45.9
  region net P15V: 18.5,71.35 41.875,71.35 41.875,63.4 41.874,63.4 21.55,63.4 18.475,66.475 18.475,71.375 18.5,71.4
  region net GND: 35.909,52.703 37.843,53.748 38.319,52.693 36.421,51.629
  region net GND: 30.55,52.648 32.484,53.693 32.974,52.607 31.076,51.543
  region net GND: 25.395,52.631 27.328,53.676 27.785,52.663 25.886,51.599
  region net GND: 37.375,54.15 37.375,53.525 38.75,51.125 41.825,51.125 41.825,51.775 40.494,54.15
  region net GND: 32.175,54.15 32.175,53.525 33.55,51.125 36.625,51.125 36.625,51.775 35.294,54.15
  region net GND: 26.95,54.15 26.95,53.525 28.325,51.125 31.4,51.125 31.4,51.775 30.069,54.15
  region net GND: 21.775,54.15 21.775,53.525 23.15,51.125 26.225,51.125 26.225,51.775 24.894,54.15
Bottom Layer:
  rectangle net PH3: 21.65,22.95 48.575,27.4
  rectangle net P15V: 21.878,30.965 41.999,41.706
  rectangle net P15V: 16.025,32.525 42,37.55
  rectangle net PH2: 38.75,42.975 45.25,48.425
  rectangle net PH2: 21.7,44.725 42.425,48.225
  rectangle net PH1: 21.703,56 48.278,59.775
  rectangle net P15V: 19.4,63.75 41.925,71.25

## Silkscreen, mask and mechanical layers (free items; w line width, h text height)
Top Overlay:
  text "GND" at 47.475,70.8 h0.8
  text "VCC" at 17.425,65.125 h0.8
  text "GND" at 7.375,51.2 h0.8
  text "GND" at 49.725,50.95 h0.8 r90
  text "VCC" at 17.25,31.475 h0.8
  text "GND" at 34.6,11.425 h0.8
  text "VCC" at 17.35,11.325 h0.8
  text "GND" at 44.775,7.75 h0.8
  text "CON1 / 8 - Vcc - 12V / 7 - PH1HI / 6 - PH1LO / 5 - PH2HI / 4 - PH2LO / 3 - PH3HI / 2 - PH3LO / 1 - GND" at 1.475,-6 h0.8
Mechanical 4:
  the board outline again, w0.2